# EAGLE board 5VACDC1 (EAGLE 9.6.2)
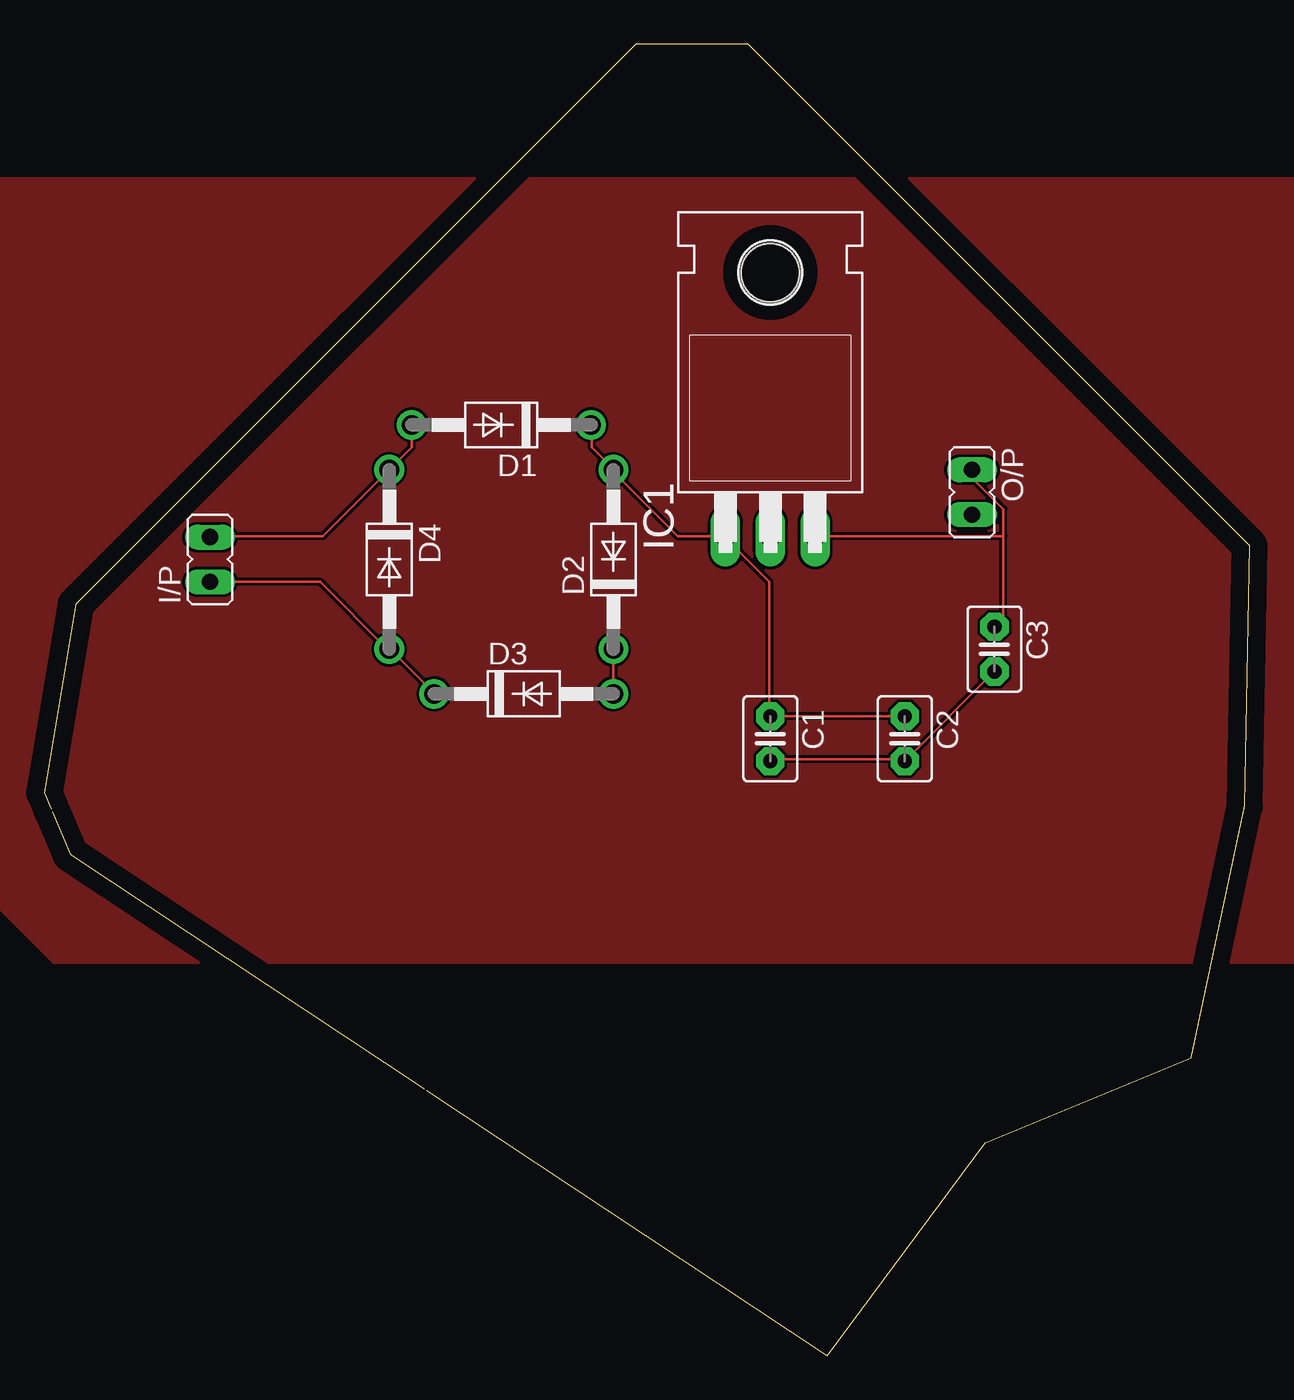
[diagram p0: board, top side]
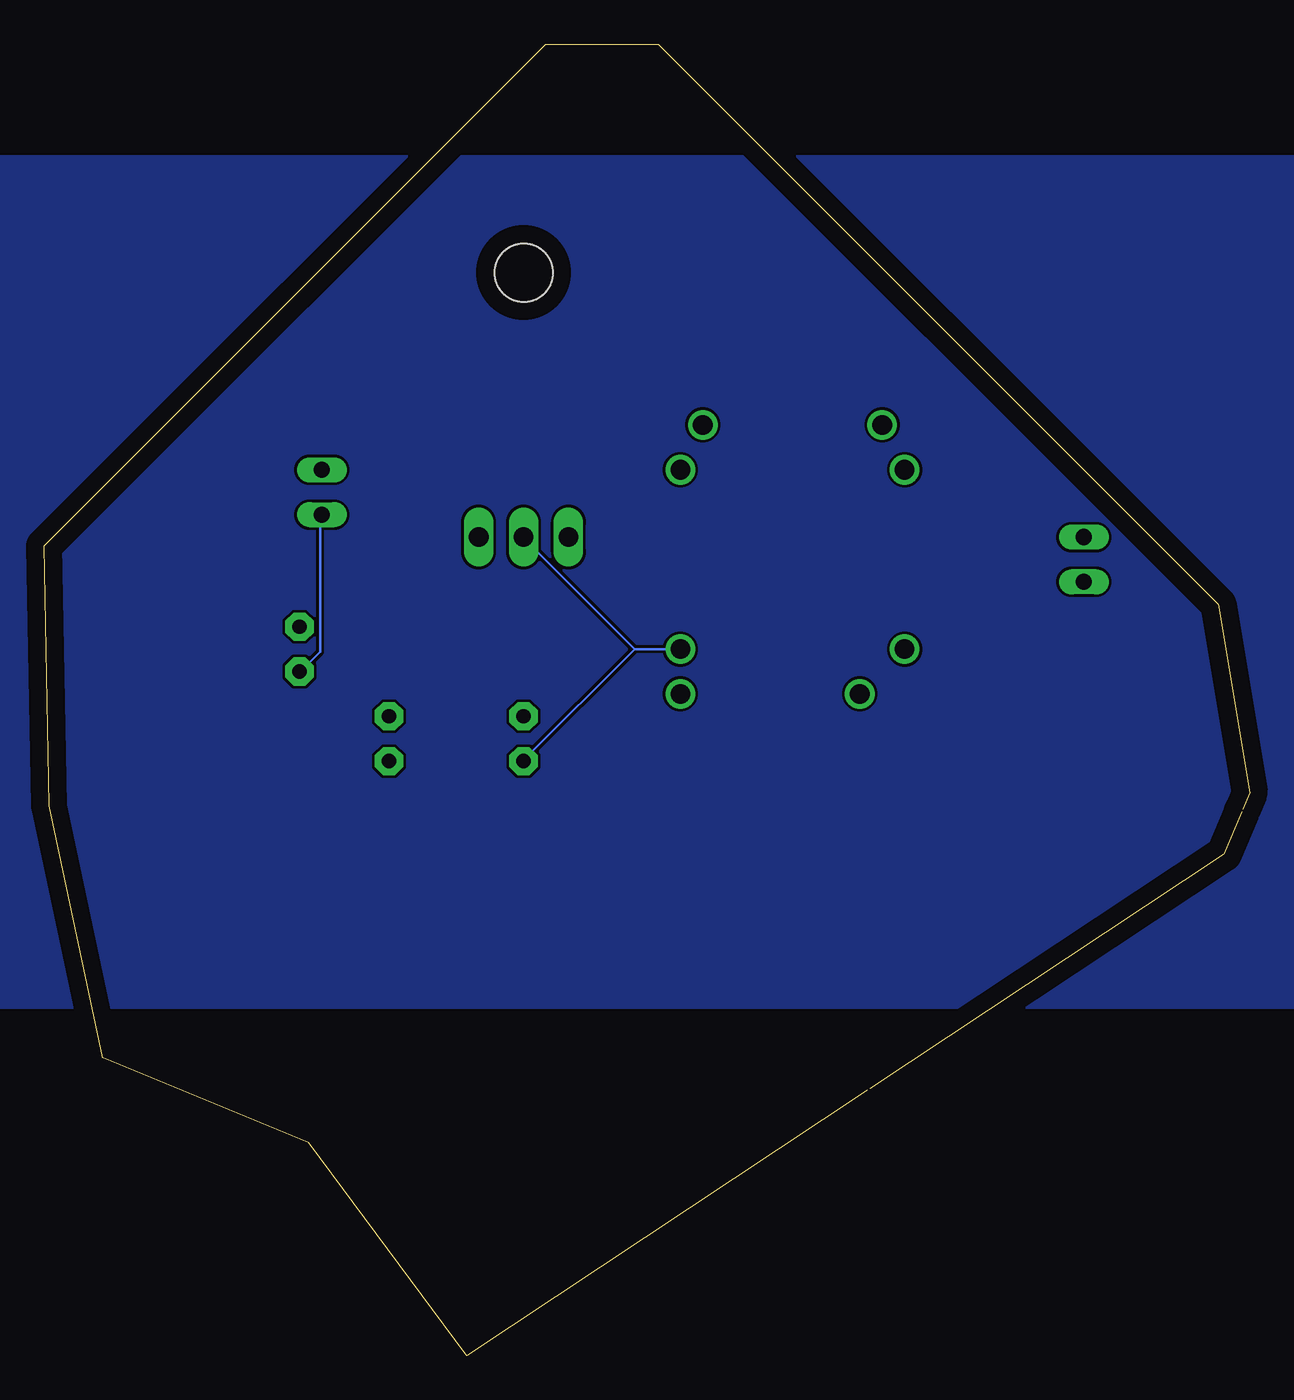
[diagram p1: board, bottom side, seen from below]

Size 68.32 x 74.33 mm. Coordinates in mm from the lower left corner, seen from the top.
Outline: 44.37,0 44.37,0
Outline: 44.37,0 arc59 44.37,0
Outline: 44.37,0 53.32,12.06 64.99,16.9
Outline: 64.99,16.9 64.99,16.9
Outline: 64.99,16.9 68.04,31.16 68.32,45.9 39.89,74.33 33.52,74.33 1.78,42.59 0,31.92 0.4,30.97
Outline: 0.46,30.83 1.47,28.43 21.54,15.13
Outline: 21.66,15.05 44.37,0
Copper layers (1*16): Top 0.035mm / dielectric 1.5mm / Bottom 0.035mm
Design rules "default": minimum track width 6mil, minimum drill 0.35mm, track to track 6mil, track to pad 6mil, pad to pad 6mil, via to via 6mil, smd to smd 6mil, copper to edge 40mil, drill to drill 6mil, minimum pad ring 10mil, minimum via ring 8mil, stop-mask expansion 4mil, vias tented up to drill 0mil, thermal gap 10mil

## Footprints (pad centres in the part's own frame; a part is rotated, then mirrored left to right if it is on the bottom)
C2.5-3 = drill 0.813 pad 1.6 octagon: 1 -1.27,0; 2 1.27,0
DO41-10 = drill 1.118: A 5.08,0; C -5.08,0
JP1 = drill 0.914 long: 1 0,-1.27; 2 0,1.27
TO220H = drill 1.118 long: 1 -2.54,-10.16; 2 0,-10.16; 3 2.54,-10.16 | hole 3.302: 0,4.826

## Placement (x,y rotation side)
C1  [C2.5-3]  41.15,34.97 270 top
C2  [C2.5-3]  48.77,34.97 270 top
C3  [C2.5-3]  53.85,40.05 270 top
D1  1N4004  [DO41-10]  25.91,52.75 180 top
D2  1N4004  [DO41-10]  32.26,45.13 90 top
D3  1N4004  [DO41-10]  27.18,37.51 0 top
D4  1N4004  [DO41-10]  19.56,45.13 270 top
I/P  12V AC  [JP1]  9.4,45.13 0 top
IC1  7805T  [TO220H]  41.15,56.56 0 top
O/P  5V DC  [JP1]  52.58,48.94 180 top

## Library data of the parts
C1-C3 = capacitor-wima
D1-D4 = diode
I/P O/P = jumper
IC1 = linear

## Nets
N$1: D1.A D4.C I/P.2
N$2: C1.1 C2.1 D1.C D2.A IC1.1
N$3: C1.2 C2.2 C3.2 D2.C D3.A IC1.2 O/P.2
N$4: D3.C D4.A I/P.1
N$5: C3.1 IC1.3 O/P.1

## Tracks (layer width: path | path; a pad name or v marks a point on that pad's centre or on a via)
GND
  pour Bottom: -5.84,67.99 74.17,67.99 74.17,19.73 -5.84,19.73
N$1
  Top 0.152: I/P.2 9.4,46.45 15.8,46.45 D4.C 20.83,51.48 D1.A
N$2
  Top 0.152: C2.1 C1.1 41.1,36.24 41.1,43.86 38.66,46.3 IC1.1 38.51,46.45 35.92,46.45 32.26,50.11 D2.A 32.26,50.26 31.04,51.48 31.04,52.7 D1.C
N$3
  Top 0.152: D2.C D3.A | C1.2 41.25,33.8 48.72,33.8 C2.2 C3.2
  Bottom 0.152: 34.85,40.05 41.1,46.3 IC1.2 | D2.C 34.85,40.05 | O/P.2 52.68,47.67 52.68,39.9 53.75,38.83 C3.2 | 34.85,40.05 41.1,33.8 C1.2
N$4
  Top 0.152: I/P.1 15.65,43.86 19.46,40.05 D4.A 19.61,40.05 22.05,37.61 D3.C
N$5
  Top 0.152: 54.36,46.45 54.36,41.88 53.9,41.42 C3.1 | 54.36,46.45 54.36,47.97 52.68,49.65 52.68,50.11 O/P.1 | 54.36,46.45 43.69,46.45 IC1.3
TOP
  pour Top: -3.3,66.72 71.63,66.72 71.63,22.27 0.51,22.27 -3.3,26.08